# Altium PCB NBP9 Altera Cyclone BGA456 Rev1.00.PcbDoc (part 2 of 3)
Units mm, origin at the board's own origin, x right, y up, seen from the top; angles counter-clockwise.
Board outline 69 x 80.99 mm, 6 copper layers (Top Layer, MidLayer1, InternalPlane1, InternalPlane2, MidLayer2, Bottom Layer); 105 components, 269 nets, 899 pads, 453 vias.
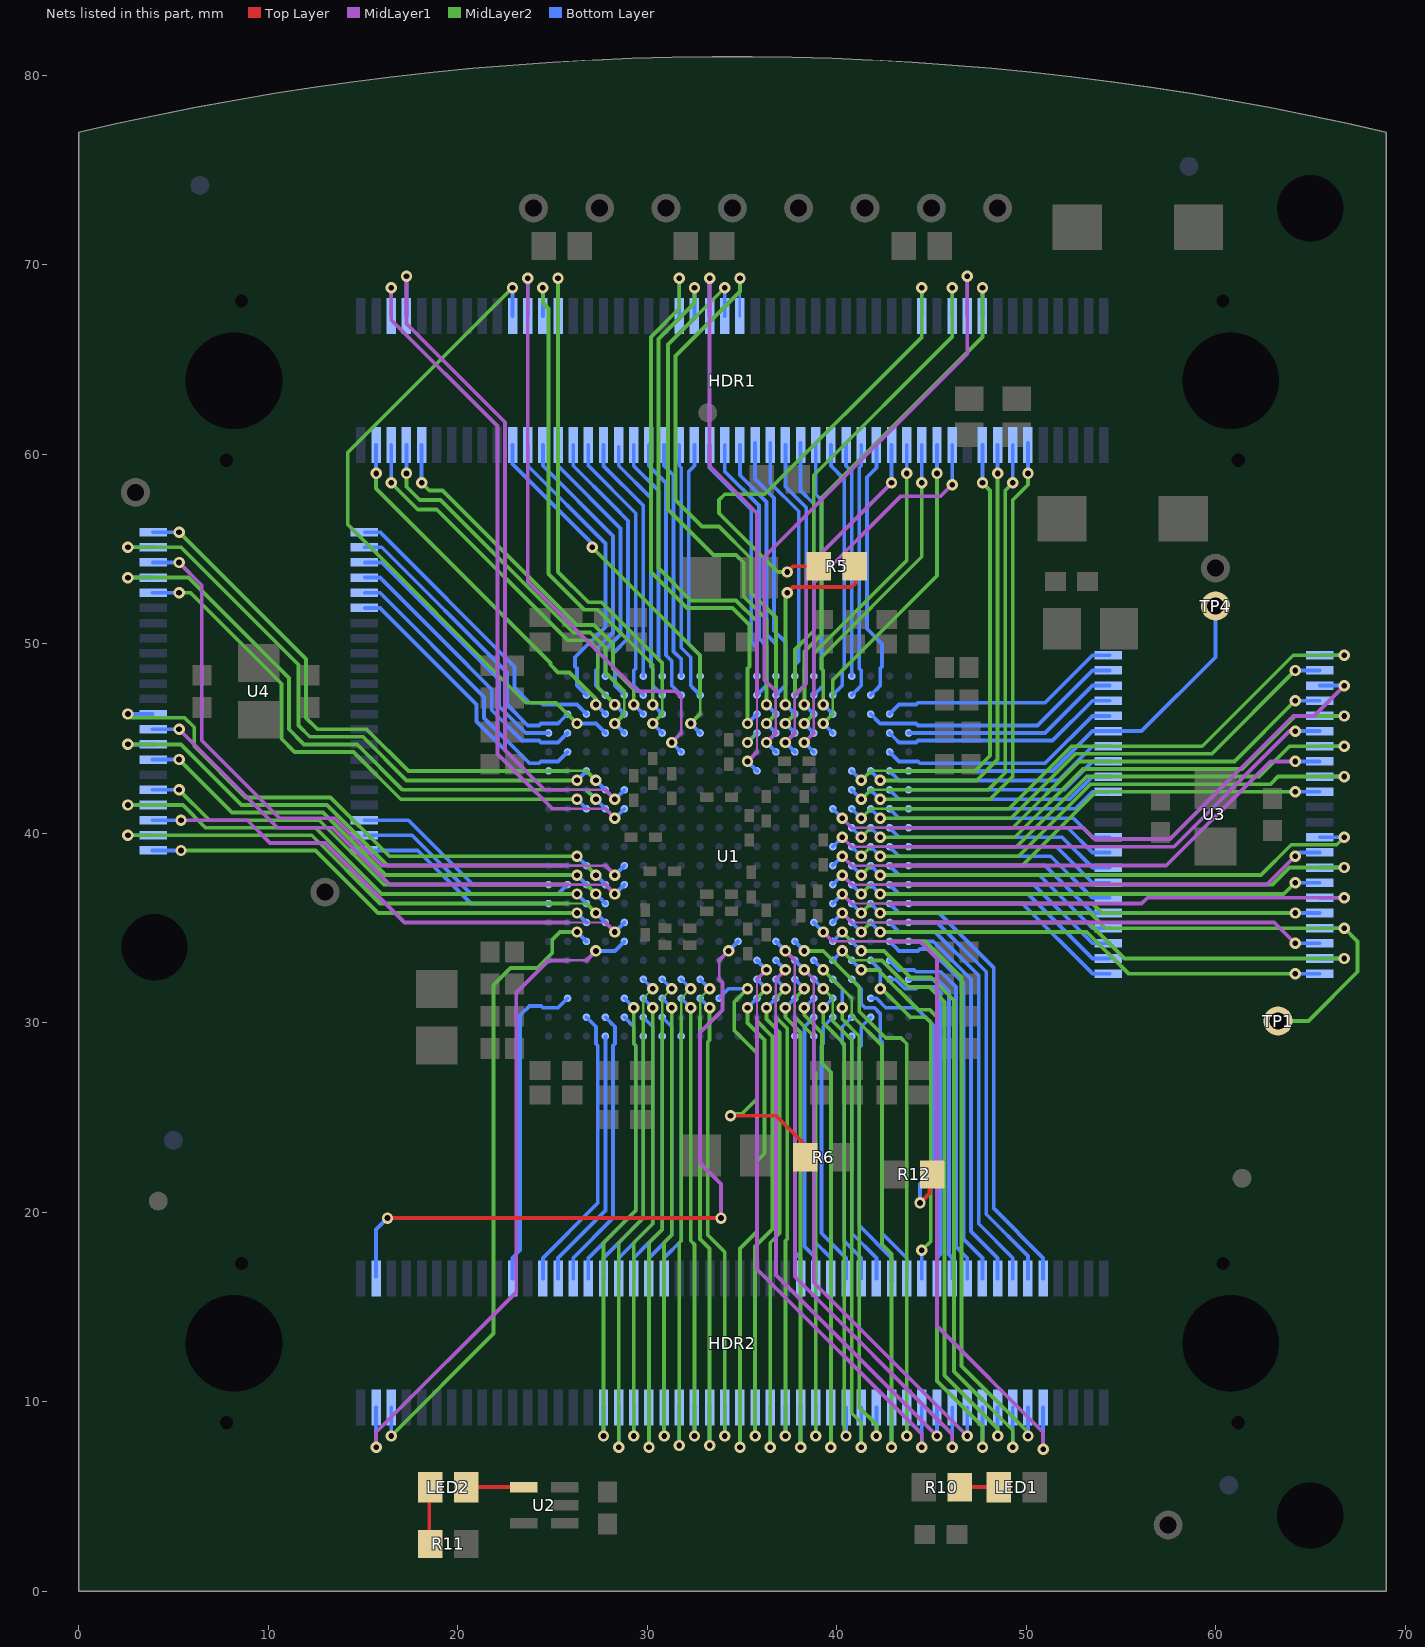
[diagram p6: the nets of this part, all layers, seen from the top]

## Via types
v1: diameter 0.6, hole 0.3, Top Layer to Bottom Layer, 453 vias

## Nets (pads, with @x,y where several pads share a name; then routed paths per layer and width w, separated by ;. In a path a pad name is that pad's centre, name@x,y a point inside that pad or via, vN(x,y) a via of type N, cw(c..) or ccw(c..) an arc to the next point about the centre after c; other vN are vias at no path point) (continued)
IO13: HDR2.33 U1.T3 | length 25.8
  MidLayer2 w0.2: v1(27.7,8.2) 27.7,18.4 29.4,20.1 29.4,28.8 29.3,28.9 v1(29.3,30.8)
  Bottom Layer w0.2: v1(27.7,8.2) HDR2.33@27.7,9.7 ; U1.T3@28.8,31.3 v1(29.3,30.8) v1@29.101,30.999
IO14: HDR2.35 U1.R4 | length 28
  MidLayer2 w0.127: 29.8,30.3 29.8,31.3 v1(30.3,31.8)
  MidLayer2 w0.2: v1(28.5,7.6) 28.5,18.4 29.8,19.7 29.8,30.3
  Bottom Layer w0.2: v1(28.5,7.6) HDR2.35@28.5,9.7 ; U1.R4@29.8,32.3 v1(30.3,31.8) v1@30.101,31.999
IO15: HDR2.37 U1.R3 | length 25.5
  MidLayer2 w0.2: v1(29.3,8.2) 29.3,18.4 30.3,19.4 v1(30.3,30.8)
  Bottom Layer w0.2: v1(29.3,8.2) HDR2.37@29.3,9.7 ; U1.R3@29.8,31.3 v1(30.3,30.8) v1@30.101,30.999
IO16: HDR2.39 U1.P4 | length 27.8
  MidLayer2 w0.127: 30.8,30.3 30.8,31.3 v1(31.3,31.8)
  MidLayer2 w0.2: v1(30.1,7.6) 30.1,18.4 30.8,19.1 30.8,30.3
  Bottom Layer w0.2: v1(30.1,7.6) HDR2.39@30.1,9.7 ; U1.P4@30.8,32.3 v1(31.3,31.8) v1@31.101,31.999
IO17: HDR2.41 U1.P3 | length 25.3
  MidLayer2 w0.2: v1(30.9,8.2) 30.9,18.4 31.3,18.8 v1(31.3,30.8)
  Bottom Layer w0.2: U1.P3@30.8,31.3 v1(31.3,30.8) v1@31.101,30.999 ; v1(30.9,8.2) HDR2.41@30.9,9.7
IO18: HDR2.43 U1.N4 | length 27.3
  MidLayer2 w0.127: 31.8,30.3 31.8,31.3 v1(32.3,31.8)
  MidLayer2 w0.2: v1(31.7,7.7) 31.7,18.4 31.8,18.5 31.8,30.3
  Bottom Layer w0.2: v1(31.7,7.7) HDR2.43@31.7,9.7 ; U1.N4@31.8,32.3 v1(32.3,31.8) v1@32.101,31.999
IO19: HDR2.45 U1.N3 | length 25.2
  MidLayer2 w0.2: v1(32.3,30.8) 32.3,18.5 32.5,18.3 v1(32.5,8.2)
  Bottom Layer w0.2: U1.N3@31.8,31.3 v1(32.3,30.8) v1@32.101,30.999 ; v1(32.5,8.2) HDR2.45@32.5,9.7
IO20: HDR2.47 U1.M4 | length 27.3
  MidLayer2 w0.127: 32.8,30.3 32.8,31.3 v1(33.3,31.8)
  MidLayer2 w0.203: 32.8,30.3 32.8,18.6 33.3,18.1 v1(33.3,7.7)
  Bottom Layer w0.2: U1.M4@32.8,32.3 v1(33.3,31.8) ; v1(33.3,7.7) HDR2.47@33.3,9.8
IO21: HDR2.49 U1.M3 | length 25.2
  MidLayer2 w0.203: v1(33.3,30.8) 33.3,29.1 33.2,29 33.2,18.8 34.1,17.9 v1(34.1,8.2)
  Bottom Layer w0.2: U1.M3@32.8,31.3 v1(33.3,30.8) ; v1(34.1,8.2) HDR2.49@34.1,9.7
IO22: HDR2.51 U1.J3 | length 26.9
  MidLayer2 w0.2: v1(34.9,7.6) 34.9,18.1 35.8,19 35.8,22.7 36.2,23.1 36.2,29.1 35.3,30 v1(35.3,30.8)
  Bottom Layer w0.2: v1(34.9,7.6) HDR2.51@34.9,9.7 ; v1(35.3,30.8) U1.J3@35.8,31.3
IO23: HDR2.53 U1.J4 | length 26.7
  MidLayer2 w0.127: 35.8,30.1 35.8,31.3
  MidLayer2 w0.2: v1(35.7,8.2) 35.7,18.2 36.6,19.1 36.6,29.3 35.8,30.1 ; 35.8,31.3 v1(36.3,31.8)
  Bottom Layer w0.2: v1(35.7,8.2) HDR2.53@35.7,9.7 ; U1.J4@35.8,32.3 v1(36.3,31.8)
IO24: HDR2.55 U1.H3 | length 26.8
  MidLayer2 w0.2: v1(36.3,30.8) 36.3,30.2 37,29.5 37,18.9 36.5,18.4 v1(36.5,7.6)
  Bottom Layer w0.2: v1(36.5,7.6) HDR2.55@36.5,9.7 ; v1@36.5,31 v1(36.3,30.8) U1.H3@36.8,31.3
IO25: HDR2.57 U1.H4 | length 26.6
  MidLayer2 w0.127: 36.8,30.3 36.8,31.3
  MidLayer2 w0.2: 36.8,30.3 37.4,29.7 37.4,18.6 37.3,18.5 v1(37.3,8.2) ; 36.8,31.3 v1(37.3,31.8)
  Bottom Layer w0.2: U1.H4@36.8,32.3 v1(37.3,31.8) v1@37.101,31.999 ; v1(37.3,8.2) HDR2.57@37.3,9.7
IO26: HDR2.59 U1.G3 | length 26.3
  MidLayer2 w0.2: v1(37.3,30.8) 37.3,30.3 38.1,29.5 v1(38.1,7.6)
  Bottom Layer w0.2: v1(37.3,30.8) U1.G3@37.8,31.3 ; v1(38.1,7.6) HDR2.59@38.1,9.7
IO27: HDR2.61 U1.G4 | length 26.8
  MidLayer2 w0.127: 37.8,30.3 37.8,31.3
  MidLayer2 w0.2: 37.8,30.3 38.8,29.3 38.8,27.5 38.9,27.4 v1(38.9,8.2) ; 37.8,31.3 v1(38.3,31.8)
  Bottom Layer w0.2: U1.G4@37.8,32.3 v1(38.3,31.8) v1@38.101,31.999 ; v1(38.9,8.2) HDR2.61@38.9,9.7
IO28: HDR2.63 U1.F3 | length 26.9
  MidLayer2 w0.2: v1(38.3,30.8) 38.3,30.4 39.225,29.475 39.225,27.875 39.7,27.4 v1(39.7,7.6)
  Bottom Layer w0.2: v1(38.3,30.8) v1@38.5,31 ; v1(38.3,30.8) U1.F3@38.8,31.3 ; v1(39.7,7.6) HDR2.63@39.7,9.7
IO29: HDR2.65 U1.E3 | length 25.6
  MidLayer2 w0.2: v1(39.3,30.8) 39.3,30 39.6,29.7 40.4,28.9 40.4,8.3 v1(40.5,8.2)
  Bottom Layer w0.2: v1@39.499,31 v1(39.3,30.8) U1.E3@39.8,31.3 ; v1(40.5,8.2) HDR2.65@40.5,9.7
IO30: HDR2.67 U1.F4 | length 28.1
  MidLayer2 w0.127: 39.8,30.3 39.8,31.3
  MidLayer2 w0.2: v1(39.3,31.8) 39.8,31.3 ; 39.8,30.3 39.8,30.1 40.8,29.1 40.8,9.4 41.3,8.9 v1(41.3,7.6)
  Bottom Layer w0.2: U1.F4@38.8,32.3 v1(39.3,31.8) v1@39.101,31.999 ; v1(41.3,7.6) HDR2.67@41.3,9.7
IO31: HDR2.69 U1.E4 | length 26.6
  MidLayer2 w0.2: v1(40.3,30.8) 40.3,30.2 41.2,29.3 41.2,9.7 42.1,8.8 v1(42.1,8.2)
  Bottom Layer w0.2: U1.E4@39.8,32.3 40.1,32 ; 40.101,31.999 40.3,31.8 v1(40.3,30.8) ; v1(42.1,8.2) HDR2.69@42.1,9.7
IO32: HDR2.71 U1.F5 | length 29.8
  MidLayer2 w0.127: 40.8,30.4 40.8,31.3
  MidLayer2 w0.2: v1(39.3,32.8) 40.8,31.3 ; 40.8,30.4 42.4,28.8 42.4,18.3 42.9,17.8 v1(42.9,7.6)
  Bottom Layer w0.2: U1.F5@38.8,33.3 v1(39.3,32.8) v1@39.101,32.999 ; v1(42.9,7.6) HDR2.71@42.9,9.7
IO33: HDR2.73 U1.G6 | length 31.6
  MidLayer2 w0.2: v1(38.3,33.8) 39.3,33.8 ; 39.1,33.8 39.3,33.8 ; v1(43.7,8.2) 43.7,28.9 43.4,29.2 42.6,29.2 41.2,30.6 41.2,31.9 40.3,32.8 39.3,33.8
  Bottom Layer w0.2: U1.G6@37.8,34.3 v1(38.3,33.8) v1@38.101,33.999 ; v1(43.7,8.2) HDR2.73@43.7,9.7
IO34: HDR2.75 U1.J5 | length 32.1
  MidLayer1 w0.127: 35.8,30.3 35.8,32.3
  MidLayer1 w0.2: 35.8,30.3 35.8,17 44.5,8.3 v1(44.5,7.6) ; 35.8,32.3 v1(36.3,32.8)
  Bottom Layer w0.2: U1.J5@35.8,33.3 v1(36.3,32.8) v1@36.101,32.999 ; v1(44.5,7.6) HDR2.75@44.5,9.7
IO35: HDR2.77 U1.H5 | length 30.8
  MidLayer1 w0.127: 36.8,30.3 36.8,32.3
  MidLayer1 w0.2: 36.8,30.3 36.8,16.7 v1(45.3,8.2) ; 36.8,32.3 v1(37.3,32.8)
  Bottom Layer w0.2: U1.H5@36.8,33.3 v1(37.3,32.8) v1@37.101,32.999 ; v1(45.3,8.2) HDR2.77@45.3,9.7
JIOA0: HDR1.3 U1.U18 | length 19.6
  MidLayer2 w0.2: v1@15.7,59.1 15.7,58.2 24.9,49 24.9,48.9 25.3,48.5 25.9,48.5 27.3,47.1 v1(27.3,46.8)
  Bottom Layer w0.2: v1@15.7,59.1 HDR1.3@15.7,60.5 ; v1(27.3,46.8) U1.U18@27.8,46.3
  other v1: 15.7,59
JIOA1: HDR1.5 U1.T18 | length 20.5
  MidLayer2 w0.2: v1(16.5,58.5) 17.9,57.1 18.9,57.1 25.8,50.2 26.9,50.2 27.4,49.7 27.4,47.7 v1(28.3,46.8)
  Bottom Layer w0.2: v1(16.5,58.5) HDR1.5@16.5,60.5 ; v1(28.3,46.8) U1.T18@28.8,46.3
JIOA2: HDR1.7 U1.T17 | length 21.5
  MidLayer2 w0.127: 28.8,46.3 28.8,47.3
  MidLayer2 w0.2: v1(17.3,59) 17.3,58.3 18,57.6 19.1,57.6 26.1,50.6 27,50.6 27.8,49.8 27.8,48.5 28.8,47.5 28.8,47.3 ; v1(28.3,45.8) 28.8,46.3
  Bottom Layer w0.2: v1(17.3,59) HDR1.7@17.3,60.5 ; v1(28.3,45.8) U1.T17@28.8,45.3
JIOA3: HDR1.9 U1.R18 | length 20
  MidLayer2 w0.2: v1(18.1,58.5) 18.5,58.1 19.2,58.1 26.3,51 27.2,51 28.2,50 28.2,48.7 29.3,47.6 v1(29.3,46.8)
  Bottom Layer w0.2: v1(18.1,58.5) HDR1.9@18.1,60.5 ; v1(29.3,46.8) U1.R18@29.8,46.3
JIOB0: HDR1.83 U1.D15 | length 24.9
  MidLayer2 w0.127: 41.8,43.3 42.8,43.3
  MidLayer2 w0.2: v1(41.3,42.8) 41.8,43.3 ; 42.8,43.3 47.3,43.3 48.1,44.1 48.1,58.1 v1(47.7,58.5)
  Bottom Layer w0.2: U1.D15@40.8,43.3 v1(41.3,42.8) v1@41.101,42.999 ; v1(47.7,58.5) HDR1.83@47.7,60.5
JIOB1: HDR1.85 U1.C15 | length 24.2
  MidLayer2 w0.2: v1(42.3,42.8) 47.4,42.8 48.5,43.9 v1(48.5,59)
  Bottom Layer w0.2: U1.C15@41.8,43.3 v1(42.3,42.8) v1@42.101,42.999 ; v1(48.5,59) HDR1.85@48.5,60.5
JIOB2: HDR1.87 U1.D14 | length 26.6
  MidLayer2 w0.127: 41.8,42.3 42.8,42.3
  MidLayer2 w0.2: v1(41.3,41.8) 41.8,42.3 ; 42.8,42.3 48,42.3 48.9,43.2 48.9,58.1 v1(49.3,58.5)
  Bottom Layer w0.2: U1.D14@40.8,42.3 v1(41.3,41.8) v1@41.101,41.999 ; v1(49.3,58.5) HDR1.87@49.3,60.5
JIOB3: HDR1.89 U1.C14 | length 26.4
  MidLayer2 w0.2: v1(42.3,41.8) 48.1,41.8 49.3,43 49.3,57.6 50.1,58.4 v1(50.1,59)
  Bottom Layer w0.2: U1.C14@41.8,42.3 v1(42.3,41.8) v1@42.101,41.999 ; v1(50.1,59) HDR1.89@50.1,60.6
KBCLOCK: HDR1.22 U1.U17 | length 35.8
  MidLayer2 w0.2: v1(22.9,68.8) 14.2,60.1 14.2,56.3 23.6,46.9 25.2,46.9 v1(26.3,45.8)
  Bottom Layer w0.2: HDR1.22@22.9,67.3 v1(22.9,68.8) ; v1(26.3,45.8) 27.3,45.8 U1.U17@27.8,45.3
KBDATA: HDR1.24 U1.N16 | length 31.9
  MidLayer1 w0.127: 31.8,45.3 31.8,47.2
  MidLayer1 w0.2: v1(23.7,69.3) 23.7,62.2 23.7,53.3 29.5,47.5 31.5,47.5 31.8,47.2 ; v1(31.3,44.8) 31.8,45.3
  Bottom Layer w0.2: HDR1.24@23.7,67.3 v1(23.7,69.3) ; v1(31.3,44.8) U1.N16@31.8,44.3
LCD_BCKL: HDR2.22 U1.W3 | length 17
  Bottom Layer w0.2: HDR2.22@22.9,16.5 22.9,17.6 23.3,18 23.3,30.4 23.8,30.9 24.4,30.9 24.5,30.8 25.3,30.8 U1.W3@25.8,31.3
LCD_E: HDR2.26 U1.V2 | length 15.2
  Bottom Layer w0.2: HDR2.26@24.5,16.5 24.5,17.6 27.2,20.3 27.4,20.5 27.4,28.8 27.3,28.9 27.3,29.8 U1.V2@26.8,30.3
LED0: HDR2.60 U1.G1 | length 13.2
  Bottom Layer w0.2: 37.8,28.7 U1.G1@37.8,29.3 ; 37.8,28.875 37.8,17.9 38.1,17.6 HDR2.60@38.1,16.4
LED1: HDR2.62 U1.F2 | length 14.3
  Bottom Layer w0.2: U1.F2@38.8,30.3 38.3,29.8 38.3,18.2 38.9,17.6 HDR2.62@38.9,16.5
LED2: HDR2.64 U1.F1 | length 13.5
  Bottom Layer w0.2: 38.8,28.6 U1.F1@38.8,29.3 ; 38.8,28.875 38.8,18.5 39.7,17.6 HDR2.64@39.7,16.4
LED3: HDR2.66 U1.E2 | length 14.6
  Bottom Layer w0.2: U1.E2@39.8,30.3 39.3,29.8 39.3,28.9 39.2,28.8 39.2,18.9 40.5,17.6 HDR2.66@40.5,16.5
LED4: HDR2.68 U1.D2 | length 14.4
  Bottom Layer w0.2: U1.D2@40.8,30.3 40.3,29.8 40.3,28.9 40.4,28.8 40.4,18.5 41.3,17.6 HDR2.68@41.3,16.5
LED5: HDR2.70 U1.D1 | length 13.4
  Bottom Layer w0.2: 40.8,28.8 U1.D1@40.8,29.3 ; 40.8,28.875 40.8,18.9 42.1,17.6 HDR2.70@42.1,16.5
LED6: HDR2.72 U1.C2 | length 14.9
  Bottom Layer w0.2: U1.C2@41.8,30.3 41.3,29.8 41.3,28.8 41.2,28.7 41.2,19.3 42.9,17.6 HDR2.72@42.9,16.4
LED7: HDR2.74 U1.D4 | length 17.2
  Bottom Layer w0.2: U1.D4@40.8,32.3 41.1,32 ; 41.101,31.999 41.3,31.8 41.3,31 41.5,30.8 42,30.8 42.3,30.5 42.3,29.1 42.4,29 42.4,18.9 43.7,17.6 HDR2.74@43.7,16.6
MOUSECLOCK: HDR1.26 U1.P18 | length 27
  MidLayer2 w0.2: v1(24.5,68.8) 24.5,68 24.8,67.7 24.8,53.7 26.7,51.8 27.4,51.8 30.3,48.9 v1(30.3,46.8)
  Bottom Layer w0.2: HDR1.26@24.5,67.3 24.5,67.4 v1(24.5,68.8) ; v1(30.3,46.8) U1.P18@30.8,46.3
MOUSEDATA: HDR1.28 U1.P17 | length 29.1
  MidLayer2 w0.127: 30.8,46.3 30.8,47.3
  MidLayer2 w0.2: v1(25.3,69.3) 25.3,66 25.3,53.8 26.9,52.2 27.6,52.2 30.8,49 30.8,47.3 ; v1(30.3,45.8) 30.8,46.3
  Bottom Layer w0.2: HDR1.28@25.3,67.3 v1(25.3,69.3) ; v1(30.3,45.8) U1.P17@30.8,45.3
NetLED1_1: LED1.1 R10.2 | length 2.1
  Top Layer w0.2: R10.2@46.5,5.5 LED1.1@48.6,5.5
NetLED2_1: LED2.1 R11.1 | length 3.1
  Top Layer w0.2: R11.1@18.5,2.4 LED2.1@18.5,5.5
NetLED2_2: LED2.2 U2.4 | length 3
  Top Layer w0.2: LED2.2@20.45,5.5 U2.4@23.5,5.5
NetR6_1: R6.1 U1.L3 | length 15.3
  Top Layer w0.2: v1(34.4,25.1) 36.8,25.1 38,23.9 38.4,23.5 R6.1@38.4,22.9
  MidLayer2 w0.2: v1@34.4,25.2 35,25.2 35.8,26 35.8,28.4 34.6,29.6 34.6,31.1 34.7,31.2 ; 34.725,31.2 34.725,31.225 v1(35.3,31.8)
  Bottom Layer w0.2: U1.L3@33.8,31.3 34.3,31.8 v1(35.3,31.8)
NetR12_1: R12.1 U1.C3 | length 15.3
  Top Layer w0.2: v1(44.4,20.5) 44.9,21 R12.1@44.9,22
  Bottom Layer w0.2: U1.C3@41.8,31.3 42.1,31.3 42.6,30.8 44.2,30.8 45.1,29.9 45.1,22.2 44.4,21.5 v1(44.4,20.5)
NEXUS_TCK: HDR1.82 U1.H16 | length 32.3
  MidLayer1 w0.127: 36.8,45.3 36.8,47.3
  MidLayer1 w0.2: v1(36.3,44.8) 36.8,45.3 ; 36.8,47.3 36.8,47.5 36.2,48.1 36.2,54.6 46.9,65.3 v1(46.9,69.4)
  Bottom Layer w0.2: v1(36.3,44.8) U1.H16@36.8,44.3 ; HDR1.82@46.9,67.3 v1(46.9,69.4)
NEXUS_TDI: HDR1.84 U1.F18 | length 28.1
  MidLayer2 w0.2: v1(38.3,46.8) 38.3,49.6 39.2,50.5 39.2,57.7 41.2,59.7 47.7,66.2 v1(47.7,68.8)
  Bottom Layer w0.2: v1(38.3,46.8) U1.F18@38.8,46.3 ; HDR1.84@47.7,67.3 v1(47.7,68.8)
NEXUS_TDO: HDR1.76 R5.1 | length 25.7
  Top Layer w0.2: v1(37.4,53.8) 37.7,54.1 R5.1@39,54.1
  MidLayer2 w0.2: v1(37.4,53.8) 36.9,53.8 33.8,56.9 33.8,57.6 34.1,57.9 36.2,57.9 44.5,66.2 v1(44.5,68.8)
  Bottom Layer w0.2: HDR1.76@44.5,67.3 v1(44.5,68.8)
NEXUS_TDO#: R5.2 U1.G18 | length 11.8
  Top Layer w0.2: v1(37.4,52.7) 37.7,53 40.8,53 41,53.2 R5.2@41,54.5
  MidLayer2 w0.2: v1(37.3,46.8) 37.3,52.6 v1(37.4,52.7)
  Bottom Layer w0.2: v1(37.3,46.8) U1.G18@37.8,46.3
NEXUS_TMS: HDR1.80 U1.G17 | length 29.1
  MidLayer2 w0.127: 37.8,46.3 37.8,47.3
  MidLayer2 w0.2: v1(37.3,45.8) 37.8,46.3 ; 37.8,47.3 37.8,49.7 38.8,50.7 38.8,58.9 46.1,66.2 v1(46.1,68.8)
  Bottom Layer w0.2: v1@37.5,45.6 v1(37.3,45.8) U1.G17@37.8,45.3 ; HDR1.80@46.1,67.3 v1(46.1,68.8)
RAM0_DATA0: HDR2.42 U1.N1 | length 13.4
  Bottom Layer w0.2: HDR2.42@30.9,16.5 30.9,17.6 31.8,18.5 31.8,28.875 ; 31.8,28.6 U1.N1@31.8,29.3
RAM0_DATA1: HDR2.40 U1.P2 | length 14.6
  Bottom Layer w0.2: HDR2.40@30.1,16.4 30.1,17.6 31.3,18.8 31.3,29.8 U1.P2@30.8,30.3
RAM0_DATA2: HDR2.38 U1.P1 | length 13.5
  Bottom Layer w0.2: HDR2.38@29.3,16.5 29.3,17.6 30,18.3 30.8,19.1 30.8,28.875 ; 30.8,28.8 U1.P1@30.8,29.3
RAM0_DATA3: HDR2.36 U1.R2 | length 14.8
  Bottom Layer w0.2: HDR2.36@28.5,16.5 28.5,17.6 30.3,19.4 30.3,27.5 30.3,29.8 U1.R2@29.8,30.3
RAM0_DATA4: HDR2.34 U1.R1 | length 13.6
  Bottom Layer w0.2: HDR2.34@27.7,16.5 27.7,17.6 29.8,19.7 29.8,28.875 ; 29.8,28.9 U1.R1@29.8,29.3
RAM0_DATA5: HDR2.32 U1.T2 | length 15.4
  Bottom Layer w0.2: HDR2.32@26.9,16.5 26.9,17.6 29.4,20.1 29.4,28.8 29.3,28.9 29.3,29.8 ; U1.T2@28.8,30.3 29.3,29.8 ; 29.101,29.999 29.3,29.8
RAM0_DATA6: HDR2.30 U1.U2 | length 15.2
  Bottom Layer w0.2: HDR2.30@26.1,16.5 26.1,17.6 28.2,19.7 28.2,28.8 28.3,28.9 28.3,29.8 ; U1.U2@27.8,30.3 28.3,29.8 ; 28.101,29.999 28.3,29.8
RAM0_DATA7: HDR2.28 U1.U1 | length 13.9
  Bottom Layer w0.2: HDR2.28@25.3,16.5 25.3,17.6 27.8,20.1 27.8,27.5 27.8,28.875 ; 27.8,28.8 U1.U1@27.8,29.3
RAM0_OE: HDR1.41 U1.N20 | length 12.6
  Bottom Layer w0.2: HDR1.41@30.9,60.5 30.9,59.4 31.2,59.1 31.4,58.9 31.4,49.6 31.8,49.2 U1.N20@31.8,48.3
RAM0_WE: HDR1.79 U1.F16 | length 20.9
  MidLayer1 w0.127: 38.8,45.3 38.8,47.3
  MidLayer1 w0.2: v1(38.3,44.8) 38.8,45.3 ; 38.8,47.3 38.8,53.2 43.4,57.8 45.5,57.8 v1(46.1,58.4)
  Bottom Layer w0.2: v1(38.3,44.8) U1.F16@38.8,44.3 ; v1(46.1,58.4) HDR1.79@46.1,60.5
RAM1_DATA0: HDR1.45 U1.M20 | length 12.6
  Bottom Layer w0.2: HDR1.45@32.5,60.5 32.5,59.4 32.2,59.1 32.2,50 32.8,49.4 32.8,49 U1.M20@32.8,48.3
RAM1_DATA1: HDR1.49 U1.J19 | length 14.5
  Bottom Layer w0.2: HDR1.49@34.1,60.5 34.1,59.1 35.9,57.3 35.9,50.3 36.3,49.9 36.3,47.8 36.2,47.7 ; U1.J19@35.8,47.3 36.2,47.7 ; 36.101,47.601 36.2,47.7
RAM1_DATA2: HDR1.53 U1.H19 | length 14.2
  Bottom Layer w0.2: HDR1.53@35.7,60.6 35.7,58.7 36.7,57.7 36.7,50.7 37.3,50.1 37.3,47.8 37.101,47.601 ; U1.H19@36.8,47.3 37.1,47.6
RAM1_DATA3: HDR1.57 U1.G19 | length 13.9
  Bottom Layer w0.2: HDR1.57@37.3,60.5 37.3,58.3 38.4,57.2 38.4,48.9 38.3,48.8 38.3,47.8 38.101,47.601 ; U1.G19@37.8,47.3 38.1,47.6
RAM1_DATA4: HDR1.55 U1.G20 | length 13
  Bottom Layer w0.2: HDR1.55@36.5,60.6 36.5,58.5 38,57 38,49.1 37.8,48.9 U1.G20@37.8,48.3
RAM1_DATA5: HDR1.51 U1.H20 | length 13
  Bottom Layer w0.2: HDR1.51@34.9,60.5 34.9,60.4 34.9,58.9 36.3,57.5 36.3,50.5 36.8,50 U1.H20@36.8,48.3
RAM1_DATA6: HDR1.47 U1.J20 | length 13.2
  Bottom Layer w0.2: HDR1.47@33.3,60.5 33.3,59.3 34.1,58.5 35.5,57.1 35.5,50.1 35.8,49.8 U1.J20@35.8,48.3
RAM1_DATA7: HDR1.43 U1.M19 | length 13.8
  Bottom Layer w0.2: HDR1.43@31.7,60.5 31.7,59.4 31.8,59.3 31.8,49.8 32.3,49.3 32.3,47.8 32.4,47.7 ; 32.5,47.6 32.4,47.7 ; U1.M19@32.8,47.3 32.4,47.7
RAM1_OE: HDR1.39 U1.N19 | length 13.9
  Bottom Layer w0.2: HDR1.39@30.1,60.5 30.1,59.4 31,58.5 31,49.4 31.3,49.1 31.3,47.8 U1.N19@31.8,47.3
RAM1_WE: HDR1.61 U1.F19 | length 13.7
  Bottom Layer w0.2: U1.F19@38.7,47.3 U1.F19@38.8,47.3 39.3,47.8 39.3,48.6 39.2,48.7 39.2,57.6 38.9,57.9 HDR1.61@38.9,60.5
RAM_ADDR0: HDR1.21 U1.M17 | length 20
  MidLayer2 w0.127: 32.8,46.3 32.8,47.3
  MidLayer2 w0.2: v1(27.1,55.1) 28,54.2 32.8,49.4 32.8,47.3 ; v1(32.3,45.8) 32.8,46.3
  Bottom Layer w0.2: HDR1.21@22.9,60.5 22.9,59.5 27.1,55.3 v1(27.1,55.1) ; v1@32.5,45.6 v1(32.3,45.8) U1.M17@32.8,45.3
RAM_ADDR1: HDR1.25 U1.U19 | length 15.3
  Bottom Layer w0.2: HDR1.25@24.5,60.5 24.5,59.4 28.2,55.7 28.2,50.6 27.4,49.8 27.4,48.7 27.3,48.6 27.3,47.8 U1.U19@27.8,47.3
RAM_ADDR2: HDR1.29 U1.T19 | length 15
  Bottom Layer w0.2: HDR1.29@26.1,60.5 26.1,59.4 28.2,57.3 29,56.5 29,50.3 28.2,49.5 28.2,48.7 28.3,48.6 28.3,47.8 U1.T19@28.8,47.3
RAM_ADDR3: HDR1.33 U1.R20 | length 13.1
  Bottom Layer w0.2: HDR1.33@27.7,60.5 27.7,59.4 29.8,57.3 U1.R20@29.8,48.3
RAM_ADDR4: HDR1.65 U1.D20 | length 12.3
  Bottom Layer w0.2: HDR1.65@40.5,60.5 40.5,59.4 40.8,59.1 U1.D20@40.8,48.3
RAM_ADDR5: HDR1.69 U1.C19 | length 14.1
  Bottom Layer w0.2: U1.C19@41.8,47.3 42.2,47.7 ; 42.101,47.601 42.3,47.8 42.3,48.7 42.4,48.8 42.4,50 41.6,50.8 41.6,58.8 42.1,59.3 HDR1.69@42.1,60.5
RAM_ADDR6: HDR1.73 U1.F17 | length 17.6
  MidLayer2 w0.127: 38.8,46.3 38.8,47.3
  MidLayer2 w0.2: v1(38.3,45.8) 38.8,46.3 ; 38.8,47.3 38.8,49.5 39.9,50.6 43.7,54.4 v1(43.7,59)
  Bottom Layer w0.2: v1(38.3,45.8) U1.F17@38.8,45.3 ; v1(43.7,59) HDR1.73@43.7,60.5
RAM_ADDR7: HDR1.77 U1.E17 | length 17.9
  MidLayer2 w0.127: 39.8,46.3 39.8,47.3
  MidLayer2 w0.2: v1(39.3,45.8) 39.8,46.3 ; 39.8,47.3 39.8,48.1 41.1,49.4 45.3,53.6 45.3,58.4 v1(45.3,59)
  Bottom Layer w0.2: v1(39.3,45.8) U1.E17@39.8,45.3 ; v1(45.3,59) HDR1.77@45.3,60.5
RAM_ADDR8: HDR1.75 U1.E18 | length 16.6
  MidLayer2 w0.2: v1(39.3,46.8) 39.3,48.6 39.2,48.7 39.2,49.3 44.5,54.6 v1@44.5,58.5
  Bottom Layer w0.2: v1(39.3,46.8) U1.E18@39.8,46.3 ; v1(44.5,58.5) HDR1.75@44.5,60.5
RAM_ADDR9: HDR1.71 U1.G16 | length 18.7
  MidLayer1 w0.127: 37.8,45.3 37.8,47.3
  MidLayer1 w0.2: v1(37.3,44.8) 37.8,45.3 ; 37.8,47.3 38.4,47.9 38.4,54 40.2,55.8 v1(42.9,58.5)
  Bottom Layer w0.2: v1(37.3,44.8) U1.G16@37.8,44.3 ; v1(42.9,58.5) HDR1.71@42.9,60.5
RAM_ADDR10: HDR1.67 U1.D19 | length 13.6
  Bottom Layer w0.2: U1.D19@40.8,47.3 41.2,47.7 ; 41.101,47.601 41.2,47.7 ; HDR1.67@41.3,60.5 41.3,59.4 41.2,59.3 41.2,48.7 41.3,48.6 41.3,47.8 41.2,47.7
RAM_ADDR11: HDR1.63 U1.E19 | length 13.7
  Bottom Layer w0.2: HDR1.63@39.7,60.5 39.7,59.4 40.4,58.7 40.4,48.7 40.3,48.6 40.3,47.8 U1.E19@39.8,47.3
RAM_ADDR12: HDR1.59 U1.F20 | length 12.6
  Bottom Layer w0.2: HDR1.59@38.1,60.6 38.1,58.1 38.8,57.4 U1.F20@38.8,48.3
RAM_ADDR13: HDR1.35 U1.P19 | length 14.1
  Bottom Layer w0.2: HDR1.35@28.5,60.4 28.5,59.4 30.2,57.7 30.2,48.8 30.3,48.7 30.3,47.8 U1.P19@30.8,47.3
RAM_ADDR14: HDR1.31 U1.R19 | length 14.5
  Bottom Layer w0.2: HDR1.31@26.9,60.5 26.9,59.4 29.4,56.9 29.4,48.7 29.3,48.6 29.3,47.8 U1.R19@29.8,47.3
RAM_ADDR15: HDR1.27 U1.U20 | length 13.9
  Bottom Layer w0.2: HDR1.27@25.3,60.5 25.3,59.4 28.6,56.1 28.6,50.5 27.8,49.7 U1.U20@27.8,48.3
RAM_ADDR16: HDR1.23 U1.V19 | length 15.8
  Bottom Layer w0.2: HDR1.23@23.7,60.5 23.7,59.4 27.8,55.3 27.8,50.9 26.2,49.3 26.2,48.8 26.3,48.7 26.3,47.8 U1.V19@26.8,47.3
RAM_CS: HDR1.37 U1.P20 | length 12.8
  Bottom Layer w0.2: HDR1.37@29.3,60.5 29.3,59.4 30.6,58.1 30.6,49.2 30.8,49 U1.P20@30.8,48.3
RED0: HDR1.6 U1.T13 | length 37
  MidLayer1 w0.127: 25.8,41.3 27.8,41.3
  MidLayer1 w0.2: v1(16.5,68.8) 16.5,67.1 22.1,61.5 22.1,44.2 23.4,42.9 25,41.3 25.8,41.3 ; 27.8,41.3 v1(28.3,40.8)
  Bottom Layer w0.2: HDR1.6@16.5,67.3 v1(16.5,68.8) ; v1@28.499,40.999 v1(28.3,40.8) U1.T13@28.8,41.3
RED1: HDR1.8 U1.T14 | length 37.1
  MidLayer1 w0.127: 25.8,42.3 27.8,42.3
  MidLayer1 w0.2: v1(17.3,69.4) 17.3,66.9 22.5,61.7 22.5,44.4 24.6,42.3 25.8,42.3 ; 27.8,42.3 v1(28.3,41.8)
  Bottom Layer w0.2: HDR1.8@17.3,67.3 v1(17.3,69.4) ; v1@28.499,41.999 v1(28.3,41.8) U1.T14@28.8,42.3
REF_CLK: HDR2.4 U1.K6 | length 37
  Top Layer w0.2: v1(16.3,19.7) v1(33.9,19.7)
  MidLayer1 w0.127: 33.8,32.3 33.8,33.3
  MidLayer1 w0.2: 33.8,32.3 33.975,32.125 33.975,30.675 32.8,29.5 32.8,22.6 33.9,21.5 v1(33.9,19.7) ; 33.8,33.3 v1(34.3,33.8)
  Bottom Layer w0.2: HDR2.4@15.7,16.6 15.7,19.1 v1(16.3,19.7) ; v1(34.3,33.8) U1.K6@34.8,34.3
SCL: HDR2.5 U1.V6 | length 34.2
  MidLayer2 w0.2: v1(16.5,8.2) 21.9,13.6 21.9,32 22.8,32.9 24.2,32.9 25,33.7 25,34.4 25.4,34.8 v1(26.3,34.8)
  Bottom Layer w0.2: v1(16.5,8.2) HDR2.5@16.5,9.7 ; v1(26.3,34.8) U1.V6@26.8,34.3
SDA: HDR2.3 U1.T6 | length 36
  MidLayer1 w0.127: 25.8,33.3 26.8,33.3
  MidLayer1 w0.2: v1(15.7,7.6) 15.7,8.4 23.1,15.8 23.1,31.6 24.8,33.3 25.8,33.3 ; 26.8,33.3 v1(27.3,33.8)
  Bottom Layer w0.2: v1(15.7,7.6) HDR2.3@15.7,9.7 ; v1(27.3,33.8) 28.3,33.8 U1.T6@28.8,34.3
SP0: HDR2.79 U1.H6 | length 32.9
  MidLayer1 w0.127: 37.8,30.3 37.8,33.3
  MidLayer1 w0.2: v1(37.3,33.8) 37.8,33.3 ; 37.8,30.3 37.8,16.6 46.1,8.3 v1(46.1,7.6)
  Bottom Layer w0.2: U1.H6@36.8,34.3 v1(37.3,33.8) v1@37.101,33.999 ; v1(46.1,7.6) HDR2.79@46.1,9.7
SP1: HDR2.81 U1.G5 | length 30.7
  MidLayer1 w0.127: 38.8,30.3 38.8,32.3
  MidLayer1 w0.2: v1(38.3,32.8) 38.8,32.3 ; 38.8,30.3 38.8,16.3 v1(46.9,8.2)
  Bottom Layer w0.2: U1.G5@37.8,33.3 v1(38.3,32.8) v1@38.101,32.999 ; v1(46.9,8.2) HDR2.81@46.9,9.7
SP2: HDR2.83 U1.D5 | length 31.8
  MidLayer2 w0.2: v1(41.3,32.8) 42.2,32.8 44.3,30.7 44.9,30.7 45.3,30.3 45.3,11.1 47.7,8.7 v1(47.7,7.6)
  Bottom Layer w0.2: U1.D5@40.8,33.3 v1(41.3,32.8) v1@41.101,32.999 ; v1(47.7,7.6) HDR2.83@47.7,9.7
SP3: HDR2.85 U1.E5 | length 32.8
  MidLayer2 w0.127: 40.8,33.3 41.8,33.3
  MidLayer2 w0.2: v1(40.3,33.8) 40.8,33.3 ; 41.8,33.3 42.4,33.3 43.3,32.4 43.8,31.9 44.9,31.9 45.7,31.1 45.7,11.4 48.5,8.6 v1(48.5,8.2)
  Bottom Layer w0.2: U1.E5@39.8,33.3 v1(40.3,33.8) ; v1(48.5,8.2) HDR2.85@48.5,9.7
SP4: HDR2.87 U1.D6 | length 33.9
  MidLayer2 w0.2: v1(41.3,33.8) 42.5,33.8 43.9,32.4 45,32.4 46.2,31.2 46.2,11.6 49.3,8.5 v1(49.3,7.6)
  Bottom Layer w0.2: U1.D6@40.8,34.3 v1(41.3,33.8) v1@41.101,33.999 ; v1(49.3,7.6) HDR2.87@49.3,9.7
SP5: HDR2.89 U1.E6 | length 35.2
  MidLayer2 w0.127: 40.8,34.3 42.8,34.3
  MidLayer2 w0.2: v1(40.3,34.8) 40.8,34.3 ; 42.8,34.3 44.7,34.3 46.6,32.4 46.6,11.9 50.1,8.4 v1(50.1,8.2)
  Bottom Layer w0.2: U1.E6@39.8,34.3 v1(40.3,34.8) ; v1(50.1,8.2) HDR2.89@50.1,9.7
SP6: HDR2.91 U1.F7 | length 38
  MidLayer1 w0.127: 39.8,34.3 42.8,34.3
  MidLayer1 w0.2: v1(39.3,34.8) 39.8,34.3 ; 42.8,34.3 44.4,34.3 45.3,33.4 45.3,14 50.9,8.4 v1(50.9,7.5)
  Bottom Layer w0.2: U1.F7@38.8,35.3 v1(39.3,34.8) v1@39.101,34.999 ; v1(50.9,7.5) HDR2.91@50.9,9.7
SP7: HDR2.90 U1.A7 | length 22.3
  Bottom Layer w0.2: U1.A7@43.8,35.3 45.3,35.3 47.9,32.7 47.9,19.9 50.1,17.7 HDR2.90@50.1,16.5
SP8: HDR2.92 U1.B8 | length 24.7
  Bottom Layer w0.2: U1.B8@42.8,36.3 43.3,35.8 ; 43.101,35.999 43.3,35.8 45.4,35.8 48.3,32.9 48.3,20.2 50.9,17.6 HDR2.92@50.9,16.5
SP9: HDR2.88 U1.B7 | length 22.6
  Bottom Layer w0.2: U1.B7@42.8,35.3 43.3,34.8 45.2,34.8 47.5,32.5 47.5,19.4 49.3,17.6 HDR2.88@49.3,16.5
SP10: HDR2.86 U1.A6 | length 20.5
  Bottom Layer w0.2: U1.A6@43.8,34.3 45.1,34.3 47.1,32.3 47.1,19 48.5,17.6 HDR2.86@48.5,16.5
SP11: HDR2.84 U1.B6 | length 21
  Bottom Layer w0.2: U1.B6@42.8,34.3 43.2,33.9 ; 43.101,33.999 43.3,33.8 44.3,33.8 44.4,33.9 44.9,33.9 46.7,32.1 46.7,18.6 47.7,17.6 HDR2.84@47.7,16.5
SP12: HDR2.82 U1.B5 | length 19.7
  Bottom Layer w0.2: U1.B5@42.8,33.3 43.3,32.8 44.1,32.8 44.2,32.7 45.5,32.7 46.3,31.9 46.3,18.2 46.9,17.6 HDR2.82@46.9,16.5
SP13: HDR2.80 U1.A4 | length 17.6
  Bottom Layer w0.2: U1.A4@43.8,32.3 45.3,32.3 45.93,31.67 45.93,17.77 46.1,17.6 HDR2.80@46.1,16.5
SP14: HDR2.78 U1.B4 | length 18.3
  Bottom Layer w0.2: U1.B4@42.8,32.3 43.1,32.3 43.6,31.8 44.2,31.8 44.3,31.9 45.2,31.9 45.5,31.6 45.5,17.8 45.3,17.6 HDR2.78@45.3,16.5
SP15: HDR2.76 U1.C5 | length 18.8
  MidLayer2 w0.2: v1@42.3,31.9 43.9,30.3 44.7,30.3 44.975,30.025 44.975,18.475 v1(44.5,18)
  Bottom Layer w0.2: U1.C5@41.8,33.3 42.3,32.8 v1@42.3,31.9 ; HDR2.76@44.5,16.5 44.5,16.6 v1(44.5,18)
  other v1: 42.3,31.8
SPI_CLK: HDR1.46 U1.J17 | length 30.8
  MidLayer2 w0.127: v1(35.3,44.8) 35.8,45.3 35.8,47.3
  MidLayer2 w0.2: v1(32.5,68.8) 32.5,68 30.6,66.1 30.6,54 32.3,52.3 34.7,52.3 35.8,51.2 35.8,47.3
  Bottom Layer w0.2: HDR1.46@32.5,67.3 v1(32.5,68.8) ; v1(35.3,44.8) U1.J17@35.8,45.3
SPI_DIN: HDR1.44 U1.J18 | length 30.4
  MidLayer2 w0.2: v1(31.7,69.3) 31.7,67.7 30.2,66.2 30.2,53.8 32.1,51.9 34.5,51.9 35.4,51 35.4,48.8 35.3,48.7 v1(35.3,45.8)
  Bottom Layer w0.2: HDR1.44@31.7,67.3 v1(31.7,69.3) ; v1(35.3,45.8) U1.J18@35.8,46.3
SPI_DOUT: HDR1.50 U1.H18 | length 28.6
  MidLayer2 w0.2: v1(34.1,68.8) 31.1,65.8 31.1,57.1 32.5,55.7 32.9,55.3 33.5,54.7 34.7,54.7 35.1,54.3 35.1,52.5 36.3,51.3 v1(36.3,46.8)
  Bottom Layer w0.2: HDR1.50@34.1,67.3 v1(34.1,68.8) ; v1@36.5,46.6 v1(36.3,46.8) U1.H18@36.8,46.3
SPI_MODE: HDR1.52 U1.H17 | length 30.5
  MidLayer2 w0.127: 36.8,46.3 36.8,47.3
  MidLayer2 w0.2: v1(34.9,69.3) 34.9,68.6 31.5,65.2 31.5,57.6 32.9,56.2 33.8,56.2 35.5,54.5 35.5,52.7 36.8,51.4 36.8,47.3 ; v1(36.3,45.8) 36.8,46.3
  Bottom Layer w0.127: HDR1.52@34.9,67.3 v1(34.9,69.3)
  Bottom Layer w0.2: v1(36.3,45.8) U1.H17@36.8,45.3
SPI_SEL: HDR1.48 U1.J15 | length 29.4
  MidLayer1 w0.127: 35.8,44.3 35.8,47.3
  MidLayer1 w0.2: v1(33.3,69.3) 33.3,59.4 35.8,56.9 35.8,47.3 ; v1(35.3,43.8) 35.8,44.3
  Bottom Layer w0.2: HDR1.48@33.3,67.3 v1(33.3,69.3) ; v1(35.3,43.8) U1.J15@35.8,43.3
SRAM0_A0: U1.A10 U3.5 | length 11.7
  Bottom Layer w0.2: U1.A10@43.8,38.3 44.4,38.3 ; 44.225,38.3 45.9,38.3 51,38.3 53.5,35.8 U3.5@54.3,35.8
SRAM0_A1: U1.B10 U3.4 | length 13.2
  Bottom Layer w0.2: U1.B10@42.8,38.3 43.3,37.8 ; 43.101,37.999 43.3,37.8 ; U3.4@54.4,35 53.5,35 50.7,37.8 43.3,37.8
SRAM0_A2: U1.A9 U3.3 | length 11.9
  Bottom Layer w0.2: U1.A9@43.8,37.3 50.4,37.3 53.5,34.2 U3.3@54.4,34.2
SRAM0_A3: U1.B9 U3.2 | length 13.2
  Bottom Layer w0.2: U1.B9@42.8,37.3 43.3,36.8 50.1,36.8 53.5,33.4 U3.2@54.4,33.4
SRAM0_A4: U1.A8 U3.1 | length 12.3
  Bottom Layer w0.2: U1.A8@43.8,36.3 44.4,36.3 ; 44.225,36.3 45.5,36.3 49.8,36.3 53.5,32.6 U3.1@54.4,32.6
SRAM0_A5: U1.C7 U3.44 | length 25.1
  MidLayer2 w0.2: v1(42.3,34.8) 53.2,34.8 55.4,32.6 v1(64.2,32.6)
  Bottom Layer w0.2: U1.C7@41.8,35.3 v1(42.3,34.8) v1@42.101,34.999 ; v1(64.2,32.6) U3.44@65.5,32.6
SRAM0_A6: U1.D7 U3.43 | length 28.8
  MidLayer2 w0.127: 41.8,35.3 42.8,35.3
  MidLayer2 w0.2: v1(41.3,34.8) 41.8,35.3 ; 42.8,35.3 53.3,35.3 55.2,33.4 v1(66.8,33.4)
  Bottom Layer w0.2: U1.D7@40.8,35.3 v1(41.3,34.8) v1@41.101,34.999 ; U3.43@65.5,33.4 v1(66.8,33.4)
SRAM0_A7: U1.E7 U3.42 | length 26.9
  MidLayer1 w0.127: 40.8,35.3 42.8,35.3
  MidLayer1 w0.2: v1(40.3,35.8) 40.8,35.3 ; 42.8,35.3 63.1,35.3 v1(64.2,34.2)
  Bottom Layer w0.2: U1.E7@39.8,35.3 v1(40.3,35.8) v1@40.101,35.601 ; v1(64.2,34.2) U3.42@65.5,34.2
SRAM0_A8: U1.B16 U3.18 | length 12.9
  Bottom Layer w0.2: U1.B16@42.8,44.3 43.3,43.8 44.3,43.8 44.4,43.7 51,43.7 53.5,46.2 U3.18@54.4,46.2
SRAM0_A9: U1.C12 U3.27 | length 29.4
  MidLayer2 w0.2: v1(42.3,39.8) 49.4,39.8 53,43.4 61.4,43.4 64.2,46.2 v1(66.8,46.2)
  Bottom Layer w0.2: U1.C12@41.8,40.3 v1(42.3,39.8) v1@42.101,39.999 ; U3.27@65.5,46.2 v1(66.8,46.2)
SRAM0_A10: U1.D12 U3.26 | length 28.2
  MidLayer2 w0.127: 41.8,40.3 42.8,40.3
  MidLayer2 w0.2: v1(41.3,39.8) 41.8,40.3 ; 42.8,40.3 49.3,40.3 52.8,43.8 61,43.8 v1(64.2,47)
  Bottom Layer w0.2: U1.D12@40.8,40.3 v1(41.3,39.8) v1@41.101,39.999 ; v1(64.2,47) U3.26@65.5,47
SRAM0_A11: U1.E13 U3.25 | length 32.6
  MidLayer1 w0.127: 40.8,40.3 42.8,40.3
  MidLayer1 w0.2: v1(40.3,40.8) 40.8,40.3 ; 42.8,40.3 53,40.3 53.6,39.7 57.6,39.7 64.1,46.2 65.2,46.2 v1(66.8,47.8)
  Bottom Layer w0.2: U1.E13@39.8,41.3 v1(40.3,40.8) v1@40.101,40.999 ; U3.25@65.5,47.8 v1(66.8,47.8)
SRAM0_A12: U1.C13 U3.24 | length 27.4
  MidLayer2 w0.2: v1(42.3,40.8) 49.2,40.8 52.6,44.2 59.8,44.2 v1(64.2,48.6)
  Bottom Layer w0.2: U1.C13@41.8,41.3 v1(42.3,40.8) v1@42.101,40.999 ; v1(64.2,48.6) U3.24@65.5,48.6
SRAM0_A13: U1.D13 U3.23 | length 31.4
  MidLayer2 w0.127: 41.8,41.3 42.8,41.3
  MidLayer2 w0.2: v1(41.3,40.8) 41.8,41.3 ; 42.8,41.3 49.1,41.3 52.4,44.6 59.3,44.6 64.1,49.4 v1(66.8,49.4)
  Bottom Layer w0.2: U1.D13@40.8,41.3 v1(41.3,40.8) v1@41.101,40.999 ; U3.23@65.5,49.4 v1(66.8,49.4)
  other v1: 41.3,40.8
SRAM0_A14: U1.B18 U3.22 | length 13.2
  Bottom Layer w0.2: U1.B18@42.8,46.3 43.3,46.8 ; 43.101,46.601 43.3,46.8 ; U3.22@54.4,49.4 53.5,49.4 51,46.9 44.3,46.9 44.2,46.8 43.3,46.8
SRAM0_A15: U1.C18 U3.21 | length 14.3
  Bottom Layer w0.2: U1.C18@41.8,46.3 42.3,45.8 ; 42.101,45.999 42.3,45.8 ; U3.21@54.4,48.6 53.5,48.6 50.6,45.7 45.5,45.7 44.3,45.7 44.2,45.8 42.3,45.8
SRAM0_A16: U1.A17 U3.20 | length 11.7
  Bottom Layer w0.2: U1.A17@43.8,45.3 44.3,45.3 ; 44.225,45.3 45.8,45.3 51,45.3 53.5,47.8 U3.20@54.4,47.8
SRAM0_A17: U1.B17 U3.19 | length 12.7
  Bottom Layer w0.2: U1.B17@42.8,45.3 43.1,45 ; 43.101,44.999 43.3,44.8 44.2,44.8 44.3,44.9 51.4,44.9 53.5,47 U3.19@54.4,47
SRAM0_A18: U1.E11 U3.28 | length 28.9
  MidLayer1 w0.127: 40.8,39.3 42.8,39.3
  MidLayer1 w0.2: v1(40.3,39.8) 40.8,39.3 ; 42.8,39.3 57.8,39.3 63.9,45.4 v1(64.2,45.4)
  Bottom Layer w0.2: U1.E11@39.8,39.3 v1(40.3,39.8) ; v1@40.101,39.601 v1(40.3,39.8) ; v1(64.2,45.4) U3.28@65.5,45.4
SRAM0_D0: U1.A11 U3.7 | length 11.6
  Bottom Layer w0.2: U1.A11@43.8,39.3 44.4,39.3 ; 44.225,39.3 51.2,39.3 51.6,39.3 53.5,37.4 U3.7@54.4,37.4
SRAM0_D1: U1.B12 U3.8 | length 12.8
  Bottom Layer w0.2: U1.B12@42.8,40.3 43.3,39.8 ; 43.101,39.999 43.3,39.8 ; U3.8@54.4,38.2 53.5,38.2 51.9,39.8 43.3,39.8
SRAM0_D2: U1.A12 U3.9 | length 11.2
  Bottom Layer w0.2: U1.A12@43.8,40.3 44.3,40.3 ; 44.225,40.3 52.2,40.3 53.5,39 U3.9@54.4,39
SRAM0_D3: U1.B13 U3.10 | length 12.5
  Bottom Layer w0.2: U1.B13@42.8,41.3 43.3,40.8 ; 43.101,40.999 43.3,40.8 ; U3.10@54.4,39.8 53.5,39.8 52.5,40.8 51.6,40.8 46.4,40.8 43.3,40.8
SRAM0_D4: U1.A13 U3.13 | length 10.9
  Bottom Layer w0.2: U1.A13@43.8,41.3 44.3,41.3 ; 44.225,41.3 52.6,41.3 53.5,42.2 U3.13@54.3,42.2
SRAM0_D5: U1.B14 U3.14 | length 12.3
  Bottom Layer w0.2: U1.B14@42.8,42.3 43.1,42 ; 43.101,41.999 43.3,41.8 46.3,41.8 52.3,41.8 53.5,43 U3.14@54.4,43
SRAM0_D6: U1.A14 U3.15 | length 11.4
  Bottom Layer w0.2: U1.A14@43.8,42.3 44.4,42.3 ; 44.225,42.3 52,42.3 53.5,43.8 U3.15@54.4,43.8
SRAM0_D7: U1.B15 U3.16 | length 12.7
  Bottom Layer w0.2: U1.B15@42.8,43.3 43.2,42.9 ; 43.101,42.999 43.3,42.8 46,42.8 51.7,42.8 53.5,44.6 U3.16@54.4,44.6
SRAM0_D8: U1.D11 U3.29 | length 30.2
  MidLayer2 w0.127: 41.8,39.3 42.8,39.3
  MidLayer2 w0.2: v1(41.3,38.8) 41.8,39.3 ; 42.8,39.3 49.5,39.3 53.2,43 62.3,43 63.9,44.6 v1(66.8,44.6)
  Bottom Layer w0.2: U1.D11@40.8,39.3 v1(41.3,38.8) v1@41.101,38.999 ; U3.29@65.5,44.6 v1(66.8,44.6)
SRAM0_D9: U1.E10 U3.30 | length 28.8
  MidLayer1 w0.127: 40.8,38.3 42.8,38.3
  MidLayer1 w0.2: v1(40.3,38.8) 40.8,38.3 ; 42.8,38.3 57.4,38.3 62.9,43.8 v1(64.2,43.8) v1@64.2,43.9
  Bottom Layer w0.2: U1.E10@39.8,38.3 40.3,38.8 v1@40.101,38.601 ; v1(64.2,43.8) U3.30@65.5,43.8
SRAM0_D10: U1.C11 U3.31 | length 28.5
  MidLayer2 w0.2: v1(42.3,38.8) 49.6,38.8 53.4,42.6 62.9,42.6 63.3,43 v1(66.8,43)
  Bottom Layer w0.2: U1.C11@41.8,39.3 v1(42.3,38.8) v1@42.101,38.999 ; U3.31@65.5,43 v1(66.8,43)
SRAM0_D11: U1.D10 U3.32 | length 27
  MidLayer2 w0.127: 41.8,38.3 42.8,38.3
  MidLayer2 w0.2: v1(41.3,37.8) 41.8,38.3 ; 42.8,38.3 49.8,38.3 53.7,42.2 v1@64.3,42.2
  Bottom Layer w0.2: U1.D10@40.8,38.3 v1(41.3,37.8) v1@41.101,37.999 ; v1@64.3,42.2 U3.32@65.5,42.2
  other v1: 64.2,42.2
SRAM0_D12: U1.C10 U3.35 | length 27.6
  MidLayer2 w0.2: v1(42.3,37.8) 62.4,37.8 64,39.4 66.4,39.4 v1(66.8,39.8)
  Bottom Layer w0.2: U1.C10@41.8,38.3 v1(42.3,37.8) v1@42.101,37.999 ; U3.35@65.5,39.8 v1(66.8,39.8)
SRAM0_D13: U1.E9 U3.36 | length 27.1
  MidLayer1 w0.127: 40.8,37.3 42.8,37.3
  MidLayer1 w0.2: v1(40.3,37.8) 40.8,37.3 ; 42.8,37.3 62.7,37.3 v1(64.2,38.8)
  Bottom Layer w0.2: U1.E9@39.8,37.3 v1(40.3,37.8) ; v1@40.101,37.601 v1(40.3,37.8) ; v1(64.2,38.8) 64.4,39 U3.36@65.5,39
SRAM0_D14: U1.D9 U3.37 | length 27.9
  MidLayer2 w0.127: 41.8,37.3 42.8,37.3
  MidLayer2 w0.2: v1(41.3,36.8) 41.8,37.3 ; 42.8,37.3 63,37.3 63.9,38.2 v1@66.7,38.2
  Bottom Layer w0.2: U1.D9@40.8,37.3 v1(41.3,36.8) ; U3.37@65.5,38.2 v1@66.7,38.2
  other v1: 66.8,38.2
SRAM0_D15: U1.C9 U3.38 | length 24.4
  MidLayer2 w0.2: v1(42.3,36.8) 63.6,36.8 v1(64.2,37.4)
  Bottom Layer w0.2: U1.C9@41.8,37.3 v1(42.3,36.8) v1@42.101,36.999 ; v1(64.2,37.4) U3.38@65.5,37.4
SRAM0_E: U1.B11 U3.6 | length 13
  Bottom Layer w0.2: U1.B11@42.8,39.3 43.3,38.8 ; 43.101,38.999 43.3,38.8 ; U3.6@54.4,36.6 53.5,36.6 51.3,38.8 43.3,38.8
SRAM0_LB: U1.E8 U3.39 | length 28.9
  MidLayer1 w0.127: 40.8,36.3 42.8,36.3
  MidLayer1 w0.2: v1(40.3,36.8) 40.8,36.3 ; 42.8,36.3 56.1,36.3 56.4,36.6 v1@66.7,36.6
  Bottom Layer w0.2: U1.E8@39.8,36.3 v1(40.3,36.8) v1@40.101,36.601 ; U3.39@65.5,36.6 v1@66.7,36.6
  other v1: 66.8,36.6
SRAM0_OE: TP1.1 U1.C8 U3.41 | length 34.8
  MidLayer2 w0.2: v1(42.3,35.8) 53.4,35.8 54.2,35 v1@66.7,35 ; TP1.1@63.3,30.1 64.9,30.1 67.5,32.7 67.5,34.3 v1(66.8,35)
  Bottom Layer w0.2: U1.C8@41.8,36.3 42.3,35.8 v1@42.101,35.999 ; U3.41@65.5,35 v1@66.7,35
SRAM0_UB: U1.D8 U3.40 | length 25.3
  MidLayer2 w0.127: 41.8,36.3 42.8,36.3
  MidLayer2 w0.2: v1(41.3,35.8) 41.8,36.3 ; 42.8,36.3 53.5,36.3 54,35.8 v1(64.2,35.8)
  Bottom Layer w0.2: U1.D8@40.8,36.3 v1(41.3,35.8) ; v1(64.2,35.8) U3.40@65.5,35.8
SRAM0_W: TP4.1 U1.A15 U3.17 | length 21.6
  Bottom Layer w0.2: U1.A15@43.8,43.3 44.3,43.3 ; 44.225,43.3 51.4,43.3 53.5,45.4 56.1,45.4 60,49.3 TP4.1@60,52.1
SRAM1_A0: U1.U8 U4.5 | length 26.4
  MidLayer2 w0.127: 25.8,37.3 26.8,37.3
  MidLayer2 w0.2: v1(5.3,42.3) 6.9,40.7 12.7,40.7 16.1,37.3 25.8,37.3 ; 26.8,37.3 v1(27.3,36.8)
  Bottom Layer w0.2: U4.5@3.9,42.3 v1(5.3,42.3) ; v1(27.3,36.8) U1.U8@27.8,36.3
SRAM1_A1: U1.V8 U4.4 | length 27.7
  MidLayer2 w0.2: v1(2.6,41.5) 5.5,41.5 6.7,40.3 12.5,40.3 16,36.8 v1(26.3,36.8)
  Bottom Layer w0.2: v1(2.6,41.5) U4.4@3.9,41.5 ; v1(26.3,36.8) U1.V8@26.8,36.3
SRAM1_A2: U1.T7 U4.3 | length 27.8
  MidLayer1 w0.127: 25.8,35.3 27.8,35.3
  MidLayer1 w0.2: v1(5.4,40.7) 8.9,40.7 10.1,39.5 13,39.5 17.2,35.3 25.8,35.3 ; 27.8,35.3 v1(28.3,34.8)
  Bottom Layer w0.2: U4.3@3.9,40.7 v1(5.4,40.7) ; v1@28.499,35 v1(28.3,34.8) U1.T7@28.8,35.3
SRAM1_A3: U1.U7 U4.2 | length 28.7
  MidLayer2 w0.127: 25.8,36.3 26.8,36.3
  MidLayer2 w0.2: v1(2.6,39.9) 12.3,39.9 15.9,36.3 25.8,36.3 ; 26.8,36.3 v1(27.3,35.8)
  Bottom Layer w0.2: v1(2.6,39.9) U4.2@3.925,39.9 ; v1@27.5,35.6 v1(27.3,35.8) U1.U7@27.8,35.3
SRAM1_A4: U1.V7 U4.1 | length 24.5
  MidLayer2 w0.2: v1(5.4,39.1) 12.5,39.1 15.8,35.8 v1(26.3,35.8)
  Bottom Layer w0.2: U4.1@3.9,39.1 v1(5.4,39.1) ; v1(26.3,35.8) U1.V7@26.8,35.3
SRAM1_A5: U1.Y8 U4.44 | length 10.9
  Bottom Layer w0.2: U4.44@15.075,39.1 17.9,39.1 20.7,36.3 24.375,36.3 ; 24.4,36.3 U1.Y8@24.8,36.3
SRAM1_A6: U1.W9 U4.43 | length 12.2
  Bottom Layer w0.2: U4.43@15.075,39.9 17.6,39.9 20.7,36.8 25.3,36.8 U1.W9@25.8,37.3
SRAM1_A7: U1.Y9 U4.42 | length 11.1
  Bottom Layer w0.2: U4.42@15.075,40.7 17.4,40.7 20.8,37.3 24.375,37.3 ; 24.4,37.3 U1.Y9@24.8,37.3
SRAM1_A8: U1.V13 U4.18 | length 29.3
  MidLayer2 w0.2: v1(5.3,52.7) 5.9,52.7 10.7,47.9 10.7,45 11.4,44.3 14.5,44.3 17,41.8 v1(26.3,41.8)
  Bottom Layer w0.2: U4.18@3.9,52.7 v1(5.3,52.7) ; v1(26.3,41.8) U1.V13@26.8,41.3
SRAM1_A9: U1.W16 U4.27 | length 15.3
  Bottom Layer w0.2: U4.27@15.1,52.7 15.9,52.7 21.4,47.2 21.4,46.1 23.8,43.7 24.3,43.7 24.4,43.8 25.3,43.8 U1.W16@25.8,44.3
SRAM1_A10: U1.W17 U4.26 | length 15.2
  Bottom Layer w0.2: U4.26@15.1,53.5 15.9,53.5 19.3,50.1 21.8,47.6 21.8,46.5 23.4,44.9 24.3,44.9 24.4,44.8 25.3,44.8 U1.W17@25.8,45.3
SRAM1_A11: U1.Y17 U4.25 | length 14.2
  Bottom Layer w0.2: U4.25@15.1,54.3 16,54.3 19.7,50.6 22.2,48.1 22.2,46.7 23.6,45.3 U1.Y17@24.8,45.3
SRAM1_A12: U1.W18 U4.24 | length 15.9
  Bottom Layer w0.2: U4.24@15.075,55.1 16,55.1 22.6,48.5 22.6,46.8 23.7,45.7 24.3,45.7 24.4,45.8 25.3,45.8 25.499,45.999 U1.W18@25.8,46.3
SRAM1_A13: U1.V18 U4.23 | length 16.5
  Bottom Layer w0.2: U4.23@15.1,55.9 15.9,55.9 23,48.8 23,47.7 23.8,46.9 24.4,46.9 24.5,46.8 26.3,46.8 26.5,46.6 ; 26.4,46.7 U1.V18@26.8,46.3
SRAM1_A14: U1.U14 U4.22 | length 31.6
  MidLayer2 w0.127: 25.8,43.3 26.8,43.3
  MidLayer2 w0.2: v1(5.3,55.9) 12,49.2 12,46.1 12.6,45.5 15.2,45.5 17.4,43.3 25.8,43.3 ; 26.8,43.3 v1(27.3,42.8)
  Bottom Layer w0.2: U4.22@3.925,55.9 v1(5.3,55.9) ; v1@27.5,42.6 v1(27.3,42.8) U1.U14@27.8,42.3
SRAM1_A15: U1.V15 U4.21 | length 32.8
  MidLayer2 w0.2: v1(2.6,55.1) 5.4,55.1 11.6,48.9 11.6,45.7 12.2,45.1 15,45.1 17.3,42.8 v1(26.3,42.8)
  Bottom Layer w0.2: v1(2.6,55.1) U4.21@4,55.1 ; v1(26.3,42.8) U1.V15@26.8,43.3
SRAM1_A16: U1.T10 U4.20 | length 37
  MidLayer1 w0.127: 25.8,38.3 27.8,38.3
  MidLayer1 w0.2: v1(5.3,54.3) 6.5,53.1 6.5,44.9 10.6,40.8 13.5,40.8 16,38.3 25.8,38.3 ; 27.8,38.3 v1(28.3,37.8)
  Bottom Layer w0.2: U4.20@3.925,54.3 v1(5.3,54.3) ; v1@28.5,37.999 v1(28.3,37.8) U1.T10@28.8,38.3
SRAM1_A17: U1.U13 U4.19 | length 33.2
  MidLayer2 w0.127: 25.8,42.3 26.8,42.3
  MidLayer2 w0.2: v1(2.6,53.5) 5.8,53.5 11.1,48.2 11.1,45.5 11.9,44.7 14.7,44.7 17.1,42.3 25.8,42.3 ; 26.8,42.3 v1(27.3,41.8)
  Bottom Layer w0.2: v1(2.6,53.5) U4.19@3.925,53.5 ; v1(27.3,41.8) U1.U13@27.8,41.3
SRAM1_A18: U1.Y15 U4.28 | length 13.8
  Bottom Layer w0.2: U4.28@15.1,51.9 15.9,51.9 21,46.8 21,45.9 23.6,43.3 24.375,43.3 ; 24.4,43.3 U1.Y15@24.8,43.3
SRAM1_D0: U1.V9 U4.7 | length 25.6
  MidLayer2 w0.2: v1(5.3,43.9) 8.1,41.1 12.9,41.1 16.2,37.8 v1(26.3,37.8)
  Bottom Layer w0.2: U4.7@3.9,43.9 v1(5.3,43.9) ; v1(26.3,37.8) U1.V9@26.8,37.3
SRAM1_D1: U1.U9 U4.8 | length 29.6
  MidLayer2 w0.127: 25.8,38.3 26.8,38.3
  MidLayer2 w0.2: v1(2.6,44.7) 5.4,44.7 8.6,41.5 13.1,41.5 16.3,38.3 25.8,38.3 ; 26.8,38.3 v1(27.3,37.8)
  Bottom Layer w0.2: v1(2.6,44.7) U4.8@3.9,44.7 ; v1(27.3,37.8) U1.U9@27.8,37.3
SRAM1_D2: U1.T9 U4.9 | length 28.7
  MidLayer1 w0.127: 25.8,37.3 27.8,37.3
  MidLayer1 w0.2: v1(5.3,45.5) 10.5,40.3 13.4,40.3 16.4,37.3 25.8,37.3 ; 27.8,37.3 v1(28.3,36.8)
  Bottom Layer w0.2: U4.9@3.9,45.5 v1(5.3,45.5) ; v1(28.3,36.8) U1.T9@28.8,37.3
SRAM1_D3: U1.V10 U4.10 | length 29.4
  MidLayer2 w0.2: v1(2.6,46.3) 2.8,46.1 5.6,46.1 6.1,45.6 6.1,44.6 8.8,41.9 13.3,41.9 16.4,38.8 v1(26.3,38.8)
  Bottom Layer w0.2: v1(2.6,46.3) U4.10@3.9,46.3 ; v1(26.3,38.8) U1.V10@26.8,38.3